# Altium PCB 降压模块.PcbDoc
Units mil, origin at the board's own origin, x right, y up, seen from the top; angles counter-clockwise.
Board outline 6000 x 4000 mil, 2 copper layers (Top Layer, Bottom Layer); 23 components, 10 nets, 72 pads, 0 vias.
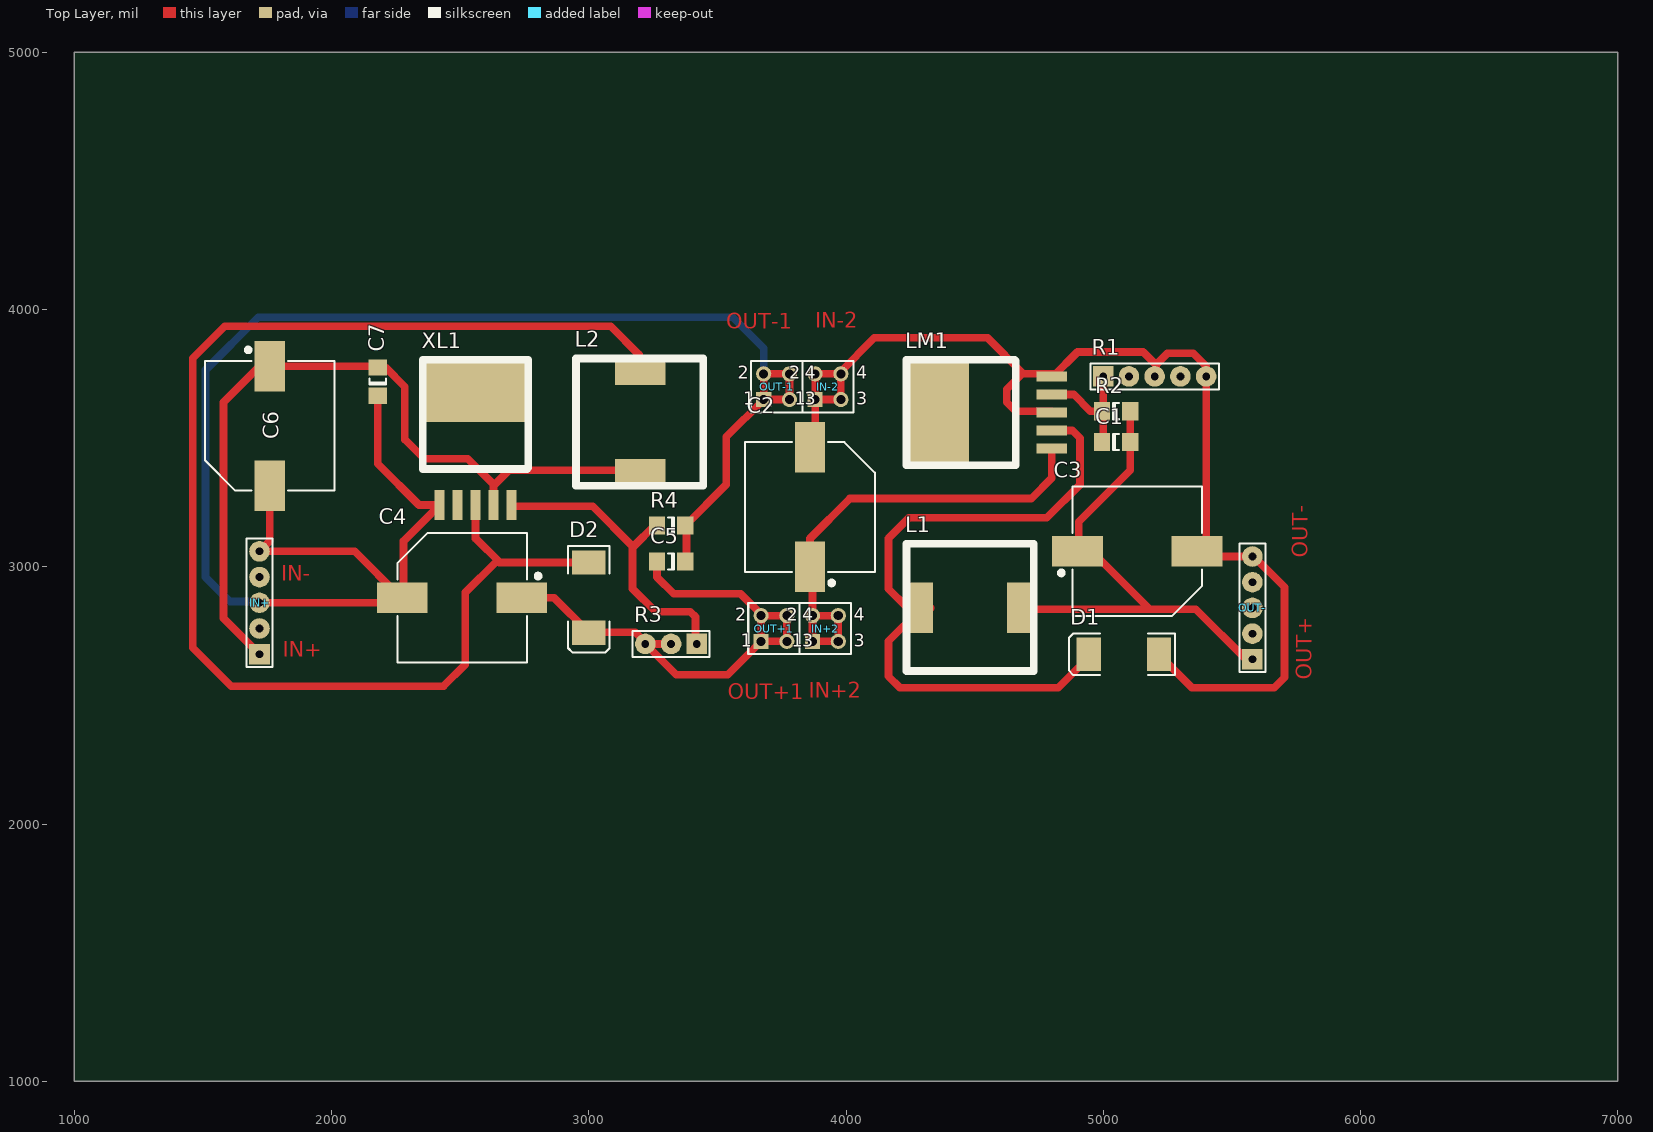
[diagram p0: Top Layer view]
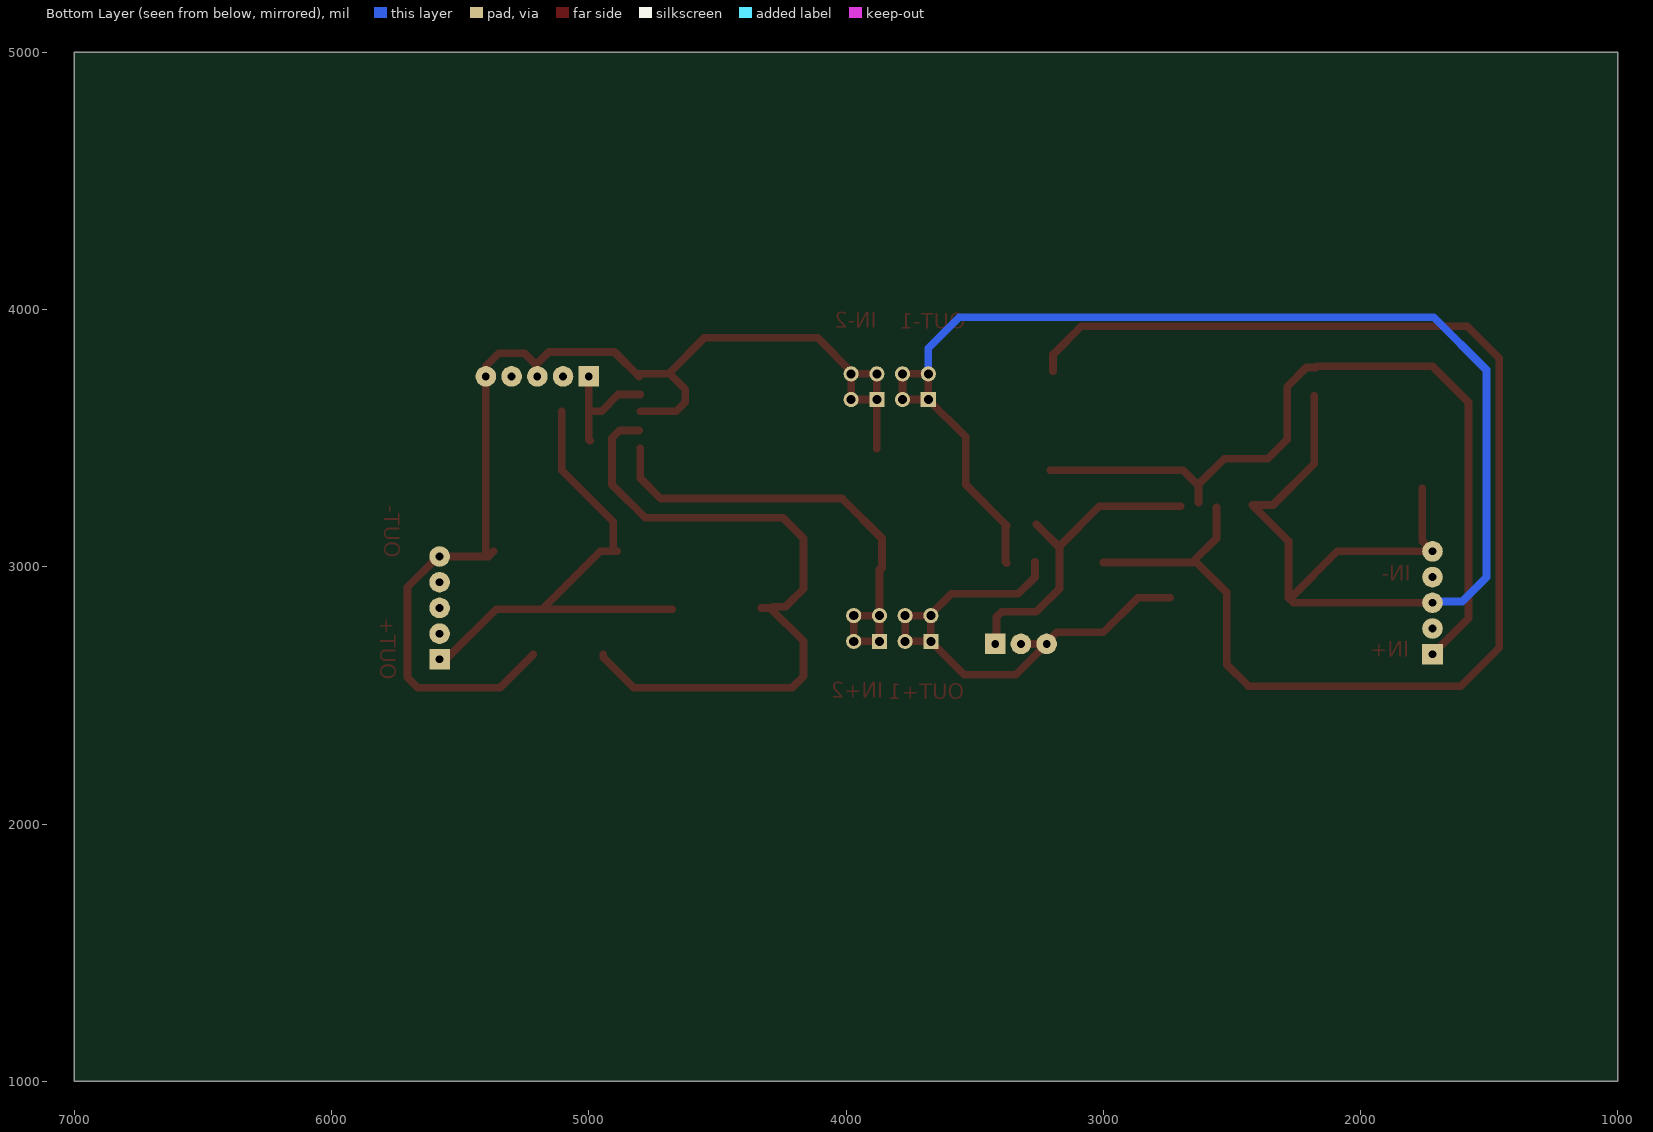
[diagram p1: Bottom Layer view, seen from below]

## Layer stack, top to bottom
Top Layer: signal copper 1.4
Dielectric: dielectric 12.6, FR-4, Dk 4.8
Bottom Layer: signal copper 1.4

## Board outline
1000,1000 7000,1000 7000,5000 1000,5000

## Design rules (kind name [scope] priority, off if disabled: settings)
Clearance [All] p1: gap=10
ComponentClearance [All] p1: gap=10 collisioncheckmode=3 verticalgap=10
PolygonConnect [All] p1: connectstyle=Relief reliefconductorwidth=10 reliefentries=4 polygonreliefangle="90 Angle"
RoutingVias [All] p1: holewidth=28 width=50 viastyle="Through Hole" minholewidth=28 minwidth=50 maxholewidth=28 maxwidth=50
SolderMaskExpansion [All] p1: expansion=4
TestPointUsage [All] p1: valid=0 allowmultiple=FALSE
Testpoint [All] p1: side=15 testpointundercomponent=TRUE minsize=40 maxsize=100 preferedsize=60 minholesize=0 maxholesize=40 preferedholesize=32 testpointgrid=1 style=1023 order=0-112345678
Width [All] p1: maxlimit=10 minlimit=10 preferedwidth=10
18 further rules are at their usual default settings.

## Classes and differential pairs
component class 升压模块: C4 C5 C6 C7 D2 IN+ L2 OUT+1 OUT-1 R3 R4 XL1
component class 降压模块: C1 C2 C3 D1 IN+2 IN-2 L1 LM1 OUT- R1 R2

## Components (designator, comment, footprint, x,y, rotation, side; value= is the part's Value field where it differs from the comment)
C1 "104" C1206 5050,3485 r0 top
C2 "220u 50v" ABSM-1574 3860,3000 r90 top
C3 "220u 50v" ABSM-1574 4900,3060 r0 top
C4 "220u 50v" ABSM-1574 2740,2880 r180 top
C5 "104" C1206 3320,3020 r180 top
C6 "220u 50v" ABSM-1574 1760,3780 r270 top
C7 "104" C1206 2180,3720 r90 top
D1 "SS34" SMC 5080,2660 r180 top
D2 "SS34" SMC 3000,2880 r270 top
IN+ "Header 3" HDR1X5 1720,2660 r90 top (schematic designator IN)
IN+2 "Header 2" HDR2X2 3870,2710 r0 top
IN-2 "Header 2" HDR2X2 3880,3650 r0 top
L1 "Inductor" l 4480,2840 r180 top
L2 "Inductor" l 3200,3560 r270 top
LM1 "Component_1" d2 4560,3600 r90 top
OUT+1 "Header 2" HDR2X2 3670,2710 r0 top
OUT- "Header 3" HDR1X5 5580,2640 r90 top (schematic designator OUT)
OUT-1 "Header 2" HDR2X2 3680,3650 r0 top
R1 "103" HDR1X5 5000,3740 r0 top
R2 "103" C1206 5050,3605 r0 top
R3 "103" HDR1X3 3420,2700 r180 top
R4 "103" C1206 3320,3160 r180 top
XL1 "XL6009e" d2 2560,3480 r0 top

## Footprints (in the part's own frame and the unit in brackets; to place one, negate y for a bottom-side part, rotate by r counter-clockwise, add the part's x,y. Pads: shape width x height; smd on the part's side, far side on the other; paste and mask are expansions set on the pad)
ABSM-1574 [mm] "Magnetic Transducer Buzzer"
  rect 5x3 smd: 1(0,0) 2(11.8,0)
  silkscreen extent -1.83,-6.4 12.3,6.4
C1206 [mm] "Chip Capacitor; Body 3.2 x 1.6 mm (LxW typ)"
  rect 1.6x1.8 smd: 1(-1.4,0) 2(1.4,0)
  silkscreen extent -0.3,-0.8 0.3,0.8
d2 [mm]
  rect 10x6 smd: 0(0,5.08)
  rect 1x3 smd: 1(-3.556,-6.096) 2(-1.778,-6.096) 3(0,-6.096) 4(1.778,-6.096) 5(3.556,-6.096)
  silkscreen extent -5.21,-2.54 5.21,8.25
HDR1X3 [mil] "Connector; Header; 3 Position"
  rect 80x80 hole 30: 1(0,0)
  round 80 hole 30: 2(100,0) 3(200,0)
  silkscreen extent -50,-50 250,50
HDR1X5 [mil] "Connector; Header; 5 Position"
  rect 80x80 hole 30: 1(0,0)
  round 80 hole 30: 2(100,0) 3(200,0) 4(300,0) 5(400,0)
  silkscreen extent -50,-50 450,50
HDR2X2 [mm] "Connector; Header; 2x2 Position"
  rect 1.5x1.5 hole 0.9: 1(0,0)
  round 1.5 hole 0.9: 2(0,2.54) 3(2.54,0) 4(2.54,2.54)
  silkscreen extent -1.27,-1.27 3.81,3.81
l [mm]
  rect 2.45x5 smd: 0(-4.953,0) 1(4.826,0)
  silkscreen extent -6.35,-6.35 6.22,6.22
SMC [mm] "DO-214-AB/SMC; 2 C-Bend Leads; Body 7.9 x 5.9 mm, inc. leads (LxW)"
  rect 2.4x3.3 smd: 1(-3.475,0) 2(3.475,0)
  silkscreen extent -5.07,-2.05 5.43,2.05

## Part data
C1 C5 C7: library part Cap, "Capacitor"
C2 C3 C4 C6: library part "Cap Pol1", "Polarized Capacitor (Radial)"
D1 D2: library part Diode, "Default Diode"
IN+ OUT-: "Header, 3-Pin"
IN+2 IN-2 OUT+1 OUT-1: "Header, 2-Pin"
R1 R3: library part RPot, "Potentiometer"
R2 R4: library part Res1, "Resistor"

## Nets (pads, with @x,y where several pads share a name; then routed paths per layer and width w, separated by ;. In a path a pad name is that pad's centre, name@x,y a point inside that pad or via, vN(x,y) a via of type N, cw(c..) or ccw(c..) an arc to the next point about the centre after c; other vN are vias at no path point)
NetC1_1: C1.1 LM1.4 R1.1 R2.1 | length 478.9
  Top Layer w30: LM1.4 4885,3670 4950,3605 R2.1 ; C1.1@4995,3490 5000,3495 R1.1@5000,3745
NetC1_2: C1.2 C3.1 L1.0 OUT-.1 R2.2 | length 1989.7
  Top Layer w30: L1.0@4675,2835 5360,2835 5555,2640 OUT-.1 ; C3.1@4890,3060 4955,3060 5175,2840 ; C3.1@4905,3060 4905,3175 5105,3375 R2.2@5105,3605
NetC2_1: C2.1 IN+2.1 IN+2.2 IN+2.3 IN+2.4 LM1.1 | length 1861.5
  Top Layer w30: C2.1@3860,2995 3860,3110 4015,3265 4720,3265 4800,3345 LM1.1 ; C2.1 3870,2990 IN+2.1 IN+2.3 IN+2.4 IN+2.2
NetC2_2: C2.2 C3.2 D1.1 IN-2.1 IN-2.2 IN-2.3 IN-2.4 LM1.3 LM1.5 OUT-.5 R1.3 R1.5 | length 4598.3
  Top Layer w30: C2.2@3880,3460 IN-2.2 IN-2.4 IN-2.3 IN-2.1 ; IN-2.4@3975,3755 4110,3890 4550,3890 4687.5,3752.5 4625,3690 4625,3640 4660,3605 LM1.3@4800,3605 ; 4685,3750 LM1.5@4815,3750 ; LM1.5@4805,3740 4900,3835 5155,3835 5205,3785 R1.3@5205,3740 ; 5205,3790 5210,3790 5250,3830 5350,3830 5400,3780 ; D1.1 5216.81,2658.19 5345,2530 5665,2530 5705,2570 5705,2920 OUT-.5@5585,3040 ; C3.2@5370,3060 5390,3040 OUT-.5 ; C3.2@5400,3055 R1.5@5400,3745
NetC4_1: C4.1 C5.2 D2.2 OUT+1.1 OUT+1.2 OUT+1.3 OUT+1.4 R3.2 R3.3 | length 2131.2
  Top Layer w30: C4.1 2865,2880 3000,2745 3180,2745 3220,2705 R3.3 ; C5.2 3264.88,2960.12 3330,2895 3590,2895 OUT+1.2@3670,2815 ; R3.2@3315,2700 R3.3 ; R3.3 3340,2580 3540,2580 OUT+1.1 ; OUT+1.1 OUT+1.3 OUT+1.4 OUT+1.2 OUT+1.1
NetC4_2: C4.2 C5.1 C6.2 C7.1 IN+.3 IN+.5 OUT-1.1 OUT-1.2 OUT-1.3 OUT-1.4 R4.1 XL1.1 | length 7058.9
  Top Layer w30: IN+.3 2260,2860 C4.2@2275,2875 ; C6.2@1760,3305 1760,3100 IN+.5 2090,3060 C4.2@2270,2880 ; C7.1 2180,3400 2340,3240 XL1.1 2280,3100 C4.2@2280,2880 ; C5.1@3375,3015 3380,3020 R4.1@3380,3160 ; R4.1@3375,3160 3535,3320 3535,3505 OUT-1.1 ; OUT-1.1 OUT-1.2 OUT-1.4 OUT-1.3 OUT-1.1
  Bottom Layer w30: IN+.3@1720,2865 1605,2865 1510,2960 1510,3765 1715,3970 3560,3970 3680,3850 OUT-1.2
NetC6_1: C6.1 C7.2 IN+.1 L2.1 XL1.4 | length 3124.4
  Top Layer w30: IN+.1 1580,2800 1580,3640 1720,3780 2170,3780 2175,3775 2210,3775 2285,3700 2285,3495 2360,3420 2530,3420 2630,3320 ; XL1.4@2630,3250 2630,3320 ; L2.1@3205,3375 2690,3375 2635,3320 2630,3320
NetD1_2: D1.2 L1.1 LM1.2 | length 2677.8
  Top Layer w30: L1.1@4285,2845 4235,2845 4165,2915 4165,3110 4245,3190 4780,3190 4910,3320 4910,3500 4880,3530 LM1.2@4805,3530 ; L1.1@4290,2835 4165,2710 4165,2575 4210,2530 4825,2530 4943.19,2648.19 D1.2 ; L1.1@4295,2840 L1.1@4330,2840
NetD2_1: D2.1 L2.0 XL1.3 | length 5233
  Top Layer w30: XL1.3@2560,3230 2560,3110 2653.19,3016.81 D2.1 ; 2645,3020 2640,3020 2520,2900 2520,2620 2435,2535 1610,2535 1460,2685 1460,3810 1585,3935 3085,3935 3195,3825 L2.0@3195,3760
NetR3_1: R3.1 R4.2 XL1.5 | length 1217
  Top Layer w30: XL1.5@2700,3235 3015,3235 3170,3080 3170,2915 3260,2825 3395,2825 3415,2805 R3.1@3415,2705 ; 3170,3075 R4.2@3260,3165
pads on no net: IN+.2 IN+.4 LM1.0 OUT-.2 OUT-.3 OUT-.4 R1.2 R1.4 XL1.0 XL1.2

## Other copper
Top Layer:
  text "IN-" at 1805,2945 h60
  text "OUT+" at 5810,2560 h60 r90

## Text inside footprints (layer, text, board x,y; h text height)
IN+2: Top Overlay "3" at 4030,2690 h50; Top Overlay "4" at 4030,2790 h50; Top Overlay "2" at 3770,2790 h50; Top Overlay "1" at 3790,2690 h50
IN-2: Top Overlay "3" at 4040,3630 h50; Top Overlay "4" at 4040,3730 h50; Top Overlay "2" at 3780,3730 h50; Top Overlay "1" at 3800,3630 h50
OUT+1: Top Overlay "3" at 3830,2690 h50; Top Overlay "4" at 3830,2790 h50; Top Overlay "2" at 3570,2790 h50; Top Overlay "1" at 3590,2690 h50
OUT-1: Top Overlay "3" at 3840,3630 h50; Top Overlay "4" at 3840,3730 h50; Top Overlay "2" at 3580,3730 h50; Top Overlay "1" at 3600,3630 h50